# EAGLE board PIC32 (EAGLE 7.5.0)
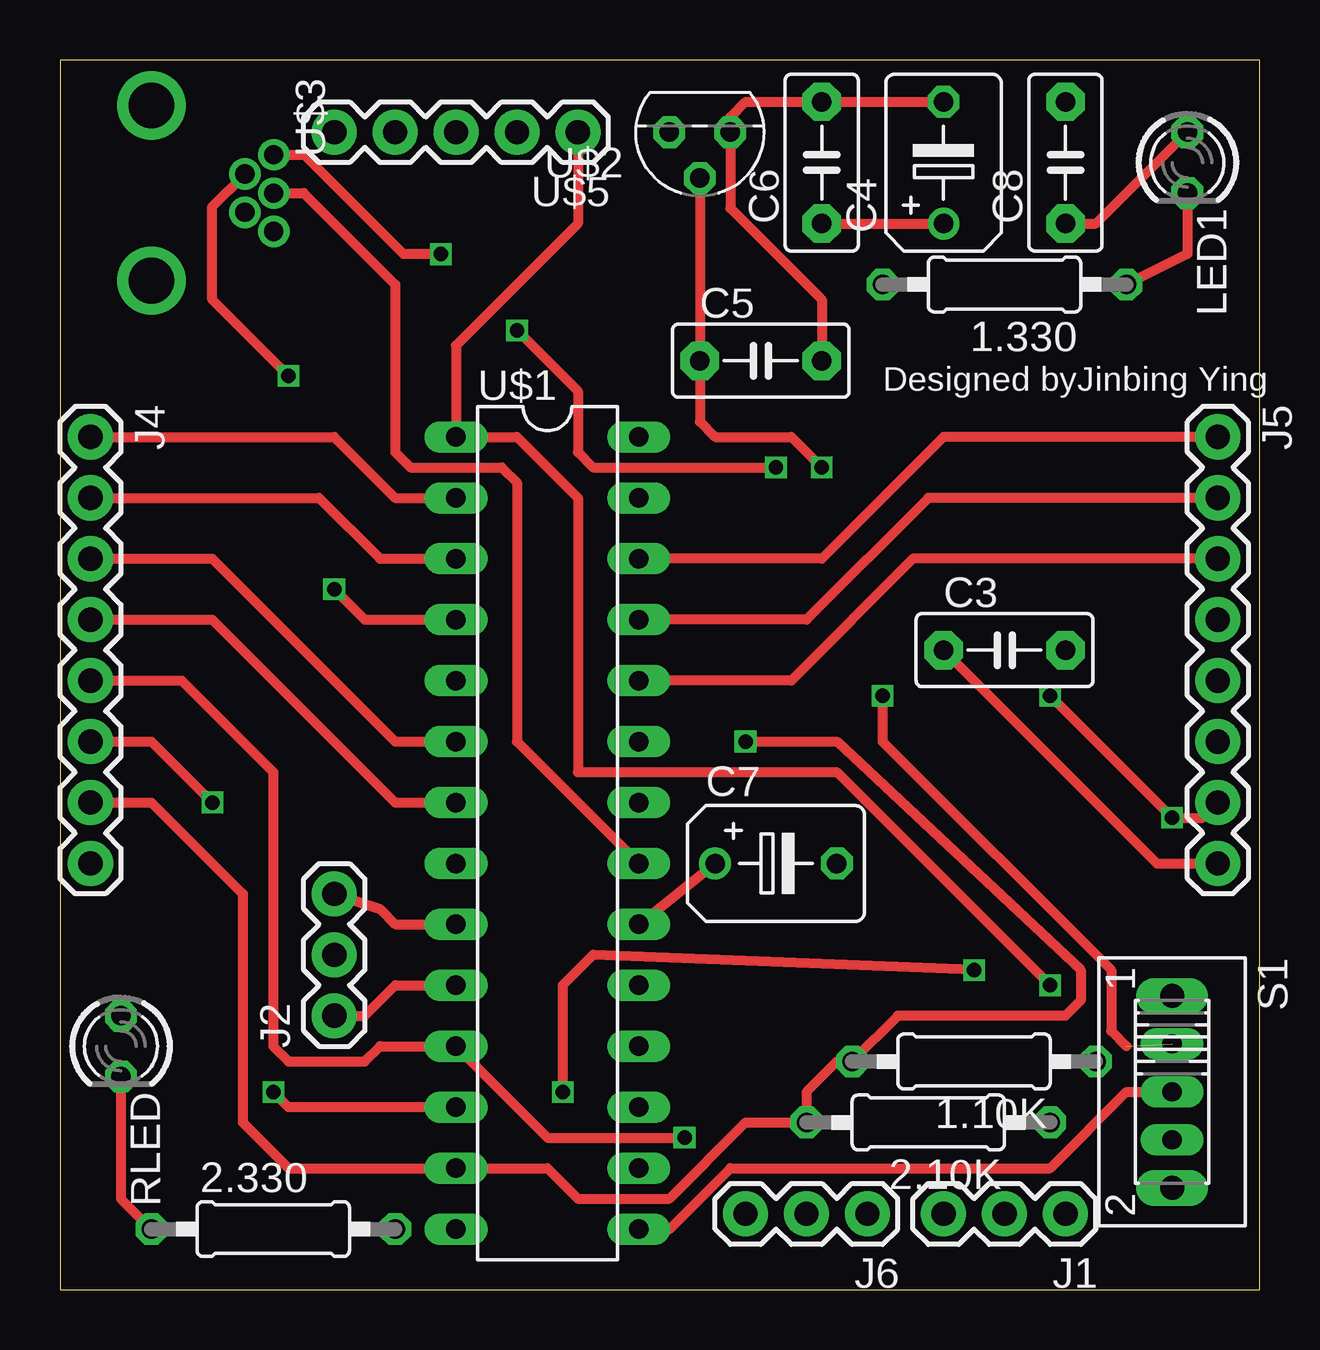
[diagram p0: board, top side]
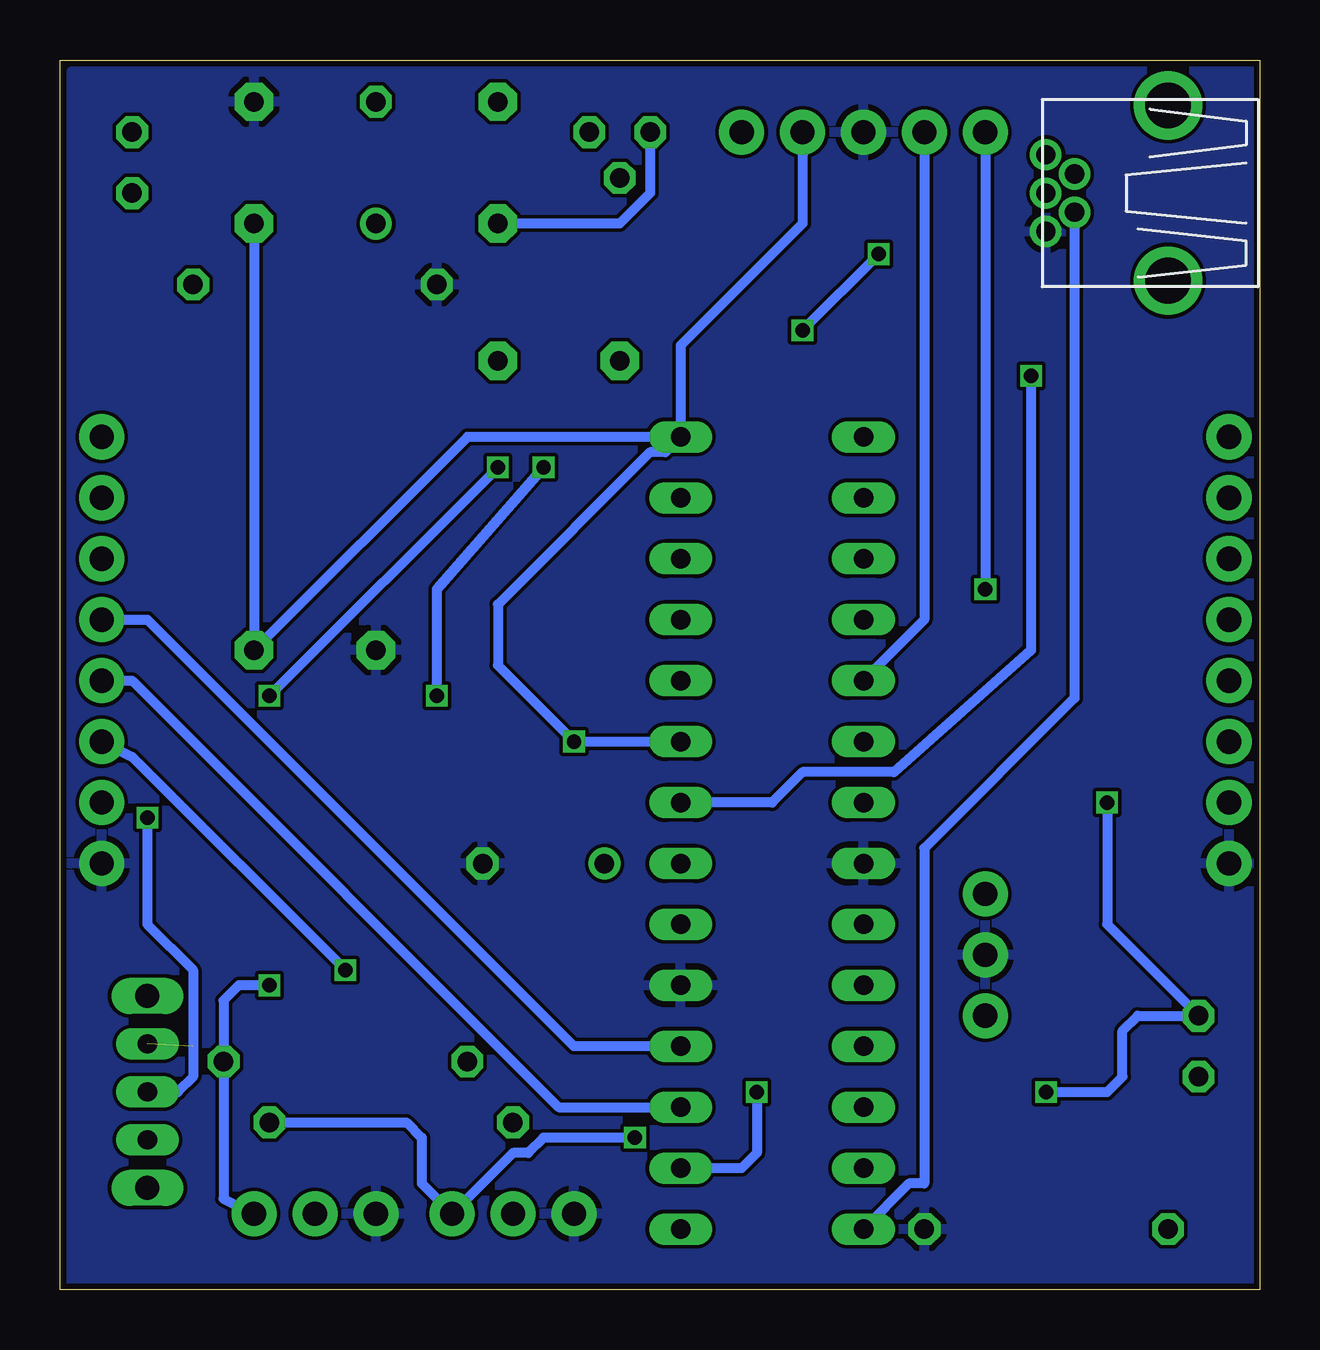
[diagram p1: board, bottom side, seen from below]

Size 50 x 51.27 mm. Coordinates in mm from the lower left corner, seen from the top.
Outline: 0,0 50,0 50,51.27 0,51.27 0,0
Copper layers (1*16): Top 0.035mm / dielectric 1.5mm / Bottom 0.035mm
Design rules "SeeedStudio_2layer_DRU_no_angle_20140221": minimum track width 6mil, minimum drill 12mil, track to track 6mil, track to pad 6mil, pad to pad 6mil, via to via 6mil, smd to smd 0mil, copper to edge 10mil, drill to drill 10mil, minimum pad ring 10mil, minimum via ring 6mil, stop-mask expansion 2mil, vias tented up to drill 100mil, thermal gap 10mil

## Footprints (pad centres in the part's own frame; a part is rotated, then mirrored left to right if it is on the bottom)
0207/10 = drill 0.813 octagon: 1 -5.08,0; 2 5.08,0
C5B3 = drill 0.813 pad 1.6 octagon: 1 -2.54,0; 2 2.54,0
B45181B = drill 0.813: + -2.54,0 | drill 0.813 octagon: - 2.54,0
1X03 = drill 1.016 pad 1.88: 1 0,0; 2 2.54,0; 3 5.08,0
1X08_ROUND = drill 1.016 pad 1.88: 1 0,0; 2 2.54,0; 3 5.08,0; 4 7.62,0; 5 10.16,0; 6 12.7,0; 7 15.24,0; 8 17.78,0
LED3MM = drill 0.813 octagon: A -1.27,0; K 1.27,0
255SB = drill 0.8 long: 1 -2,0; 2 0,0; 3 2,0 | drill 1 long: P$1 -4,0; P$2 4,0
DIL28-3 = drill 0.813 long: 1 -16.51,-3.81; 2 -13.97,-3.81; 3 -11.43,-3.81; 4 -8.89,-3.81; 5 -6.35,-3.81; 6 -3.81,-3.81; 7 -1.27,-3.81; 8 1.27,-3.81; 9 3.81,-3.81; 10 6.35,-3.81; 11 8.89,-3.81; 12 11.43,-3.81; 13 13.97,-3.81; 14 16.51,-3.81; 15 16.51,3.81; 16 13.97,3.81; 17 11.43,3.81; 18 8.89,3.81; 19 6.35,3.81; 20 3.81,3.81; 21 1.27,3.81; 22 -1.27,3.81; 23 -3.81,3.81; 24 -6.35,3.81; 25 -8.89,3.81; 26 -11.43,3.81; 27 -13.97,3.81; 28 -16.51,3.81
TO92 = drill 0.813 octagon: 1 -1.27,0; 2 0,1.905; 3 1.27,0
USB-MB-H = drill 0.8: D+ 5.1,0; D- 3.9,0.8; GND 5.1,-1.6; ID 3.9,-0.8; VBUS 5.1,1.6 | drill 1.9: P$6 0,-3.65; P$7 0,3.65
1X05 = drill 1.016 pad 1.88: 1 0,0; 2 2.54,0; 3 5.08,0; 4 7.62,0; 5 10.16,0

## Placement (x,y rotation side)
1.10K  [0207/10]  38.1,9.53 180 top
1.330  [0207/10]  39.37,41.91 180 top
2.10K  [0207/10]  36.2,6.98 180 top
2.330  [0207/10]  8.89,2.54 0 top
C3  [C5B3]  39.37,26.67 0 top
C4  [B45181B]  36.83,46.99 90 top
C5  [C5B3]  29.21,38.74 0 top
C6  [C5B3]  31.75,46.99 90 top
C7  [B45181B]  29.84,17.78 0 top
C8  [C5B3]  41.91,46.99 90 top
J1  [1X03]  41.91,3.17 180 top
J2  [1X03]  11.43,11.43 90 top
J4  [1X08_ROUND]  1.27,35.56 270 top
J5  [1X08_ROUND]  48.26,35.56 270 top
J6  [1X03]  33.66,3.17 180 top
LED1  [LED3MM]  46.99,46.99 270 top
RLED  [LED3MM]  2.54,10.16 270 top
S1  [255SB]  46.35,8.26 270 top
U$1  PIC28  [DIL28-3]  20.32,19.05 270 top
U$2  MCP1702  [TO92]  26.67,48.26 180 top
U$3  USB_01  [USB-MB-H]  3.81,45.72 0 top
U$5  SWITCH_M05  [1X05]  21.59,48.26 180 top

## Library data of the parts
1.10K 1.330 2.10K 2.330 C3-C8 J1 J2 J6 LED1 RLED U$1-U$3 U$5 = ME333
J4 J5 = ME333; PROD_ID: CONN-08437
S1 = HW2LIBRARY

## Nets
+3V3: 1.10K.2 2.10K.2 C3.2 C8.1 J4.7 LED1.A U$1.13 U$1.23 U$1.28 U$5.2
+5V: C5.1 J5.7 S1.2 U$1.15 U$2.2
A0: J4.1 U$1.2
A1: J4.2 U$1.3
A4: J4.6 RLED.A U$1.12
B2: J4.3 U$1.6
B3: J4.4 U$1.7
B4: 2.10K.1 J4.5 J6.1 U$1.11
B7: J5.6 U$1.16
B8: J5.5 U$1.17
B9: J5.4 U$1.18
B13: J5.3 U$1.24
B14: J5.2 U$1.25
B15: J5.1 U$1.26
GND: 1.330.2 2.330.2 C3.1 C7.- C8.2 J1.3 J2.2 J4.8 J5.8 J6.3 U$1.8 U$1.19 U$3.GND U$5.3
ID: U$1.14 U$3.ID
N$2: S1.1 U$3.VBUS
N$3: C4.- C5.2 C6.2 U$2.1
N$4: C4.+ C6.1 U$2.3
N$5: U$1.27
N$6: U$1.5 U$5.4
N$7: U$1.4 U$5.5
N$9: J2.3 U$1.9
N$10: J2.1 U$1.10
N$11: C7.+ U$1.20
N$12: U$1.22 U$3.D-
N$13: U$1.21 U$3.D+
N$14: 1.330.1 LED1.K
N$15: 1.10K.1 J1.1 U$1.1 U$5.1
N$29: 2.330.1 RLED.K

## Tracks (layer width: path | path; a pad name or v marks a point on that pad's centre or on a via)
+3V3  (via drill 0.6)
  Top 0.406: J4.7 3.81,20.32 7.62,16.51 7.62,6.98 9.53,5.08 U$1.13 20.32,5.08 21.59,3.81 25.4,3.81 28.57,6.98 2.10K.2 31.11,8.26 32.38,9.53 1.10K.2 34.92,11.43 41.91,11.43 42.55,12.06 42.55,13.33 32.38,22.86 v28.57,22.86 | C8.1 43.18,44.45 LED1.A
  Bottom 0.406: C8.1 C3.2 33.02,35.56 U$1.28 | U$5.2 19.05,44.45 24.13,39.37 U$1.28 | U$1.28 24.77,34.93 25.4,34.93 31.75,28.57 31.75,26.04 v28.57,22.86 U$1.23
+5V  (via drill 0.6)
  Top 0.406: U$2.2 C5.1 26.67,36.2 27.3,35.56 30.48,35.56 v31.75,34.29 | U$1.15 25.4,2.54 27.94,5.08 41.27,5.08 44.45,8.26 S1.2 | v41.27,24.77 v46.35,19.68 47.62,19.68 J5.7
  Bottom 0.406: v31.75,34.29 v41.27,24.77 | v46.35,19.68 46.35,15.24 44.45,13.33 44.45,8.89 45.09,8.26 S1.2
A0
  Top 0.406: J4.1 11.43,35.56 13.97,33.02 U$1.2
A1
  Top 0.406: J4.2 10.79,33.02 13.34,30.48 U$1.3
A4  (via drill 0.6)
  Top 0.406: J4.6 3.81,22.86 v6.35,20.32 | U$1.12 9.53,7.62 v8.89,8.26
  Bottom 0.406: v6.35,20.32 6.35,15.24 RLED.A 5.08,11.43 5.71,10.79 5.71,8.89 6.35,8.26 v8.89,8.26
B2
  Top 0.406: J4.3 6.35,30.48 13.97,22.86 U$1.6
B3
  Top 0.406: J4.4 6.35,27.94 13.97,20.32 U$1.7
B4  (via drill 0.6)
  Top 0.406: J4.5 5.08,25.4 8.89,21.59 8.89,10.16 9.53,9.53 12.7,9.53 13.34,10.16 U$1.11 20.32,6.35 v26.04,6.35
  Bottom 0.406: 2.10K.1 35.56,6.98 34.92,6.35 34.92,4.45 J6.1 31.11,5.71 30.48,5.71 29.84,6.35 v26.04,6.35
B7  (via drill 0.6)
  Top 0.406: v38.1,13.33 22.23,13.97 20.95,12.7 v20.95,8.26
  Bottom 0.406: J5.6 46.99,22.22 v38.1,13.33 | v20.95,8.26 20.95,5.71 21.59,5.08 U$1.16
B8
  Bottom 0.406: J5.5 46.99,25.4 29.21,7.62 U$1.17
B9
  Bottom 0.406: J5.4 46.35,27.94 28.57,10.16 U$1.18
B13
  Top 0.406: J5.3 35.56,30.48 30.48,25.4 U$1.24
B14
  Top 0.406: J5.2 36.2,33.02 31.11,27.94 U$1.25
B15
  Top 0.406: J5.1 36.83,35.56 31.75,30.48 U$1.26
GND
  Top 0.406: C3.1 45.72,17.78 J5.8
  pour Bottom: 0,50.8 49.53,50.8 49.53,0 0,0
ID
  Bottom 0.406: U$1.14 14.61,4.45 13.97,4.45 13.97,18.41 7.71,24.68 U$3.ID
N$2  (via drill 0.6)  (1 unrouted)
  Top 0.406: v15.88,43.18 14.32,43.18 10.18,47.32 U$3.VBUS | v19.05,40.01 21.59,37.47 21.59,34.93 22.23,34.29 v29.84,34.29 | v34.29,24.77 34.29,22.86 43.81,13.33 43.81,10.79 44.45,10.16
  Bottom 0.406: v34.29,24.77 34.29,29.21 v29.84,34.29 | v19.05,40.01 v15.88,43.18
N$3
  Top 0.406: C4.- C6.2 28.57,49.53 27.94,48.9 U$2.1 27.94,45.09 31.75,41.28 C5.2
N$4
  Top 0.406: C6.1 C4.+
  Bottom 0.406: U$2.3 25.4,45.72 26.67,44.45 C6.1
N$6
  Bottom 0.406: U$5.4 13.97,27.94 U$1.5
N$7  (via drill 0.6)
  Top 0.406: v11.43,29.21 12.7,27.94 U$1.4
  Bottom 0.406: U$5.5 v11.43,29.21
N$9
  Top 0.406: J2.3 13.34,15.88 13.97,15.24 U$1.9
N$10
  Top 0.406: J2.1 12.7,11.43 13.97,12.7 U$1.10
N$11
  Top 0.406: U$1.20 C7.+
N$12  (via drill 0.6)
  Top 0.406: v9.53,38.1 6.35,41.28 6.35,45.16 U$3.D-
  Bottom 0.406: v9.53,38.1 9.53,26.67 15.24,21.59 19.05,21.59 20.32,20.32 U$1.22
N$13
  Top 0.406: U$1.21 19.05,22.86 19.05,33.66 18.41,34.29 14.61,34.29 13.97,34.93 13.97,41.91 10.16,45.72 U$3.D+
N$14
  Top 0.406: LED1.K 46.99,43.18 1.330.1
N$15  (via drill 0.6)
  Top 0.406: U$5.1 21.59,44.45 16.51,39.37 U$1.1 19.05,35.56 21.59,33.02 21.59,21.59 32.38,21.59 v41.27,12.7
  Bottom 0.406: J1.1 43.18,3.81 1.10K.1 43.18,12.06 42.55,12.7 v41.27,12.7
N$29
  Top 0.406: RLED.K 2.54,3.81 2.330.1

## Text on the board
tPlace: Designed byJinbing Ying